# Altium PCB STM32F407VG2_Pcb.PcbDoc
Units mil, origin at the board's own origin, x right, y up, seen from the top; angles counter-clockwise.
Board outline 1757.76 x 1760 mil, 2 copper layers (Top Layer, Bottom Layer); 121 components, 90 nets, 234 pads, 134 vias.
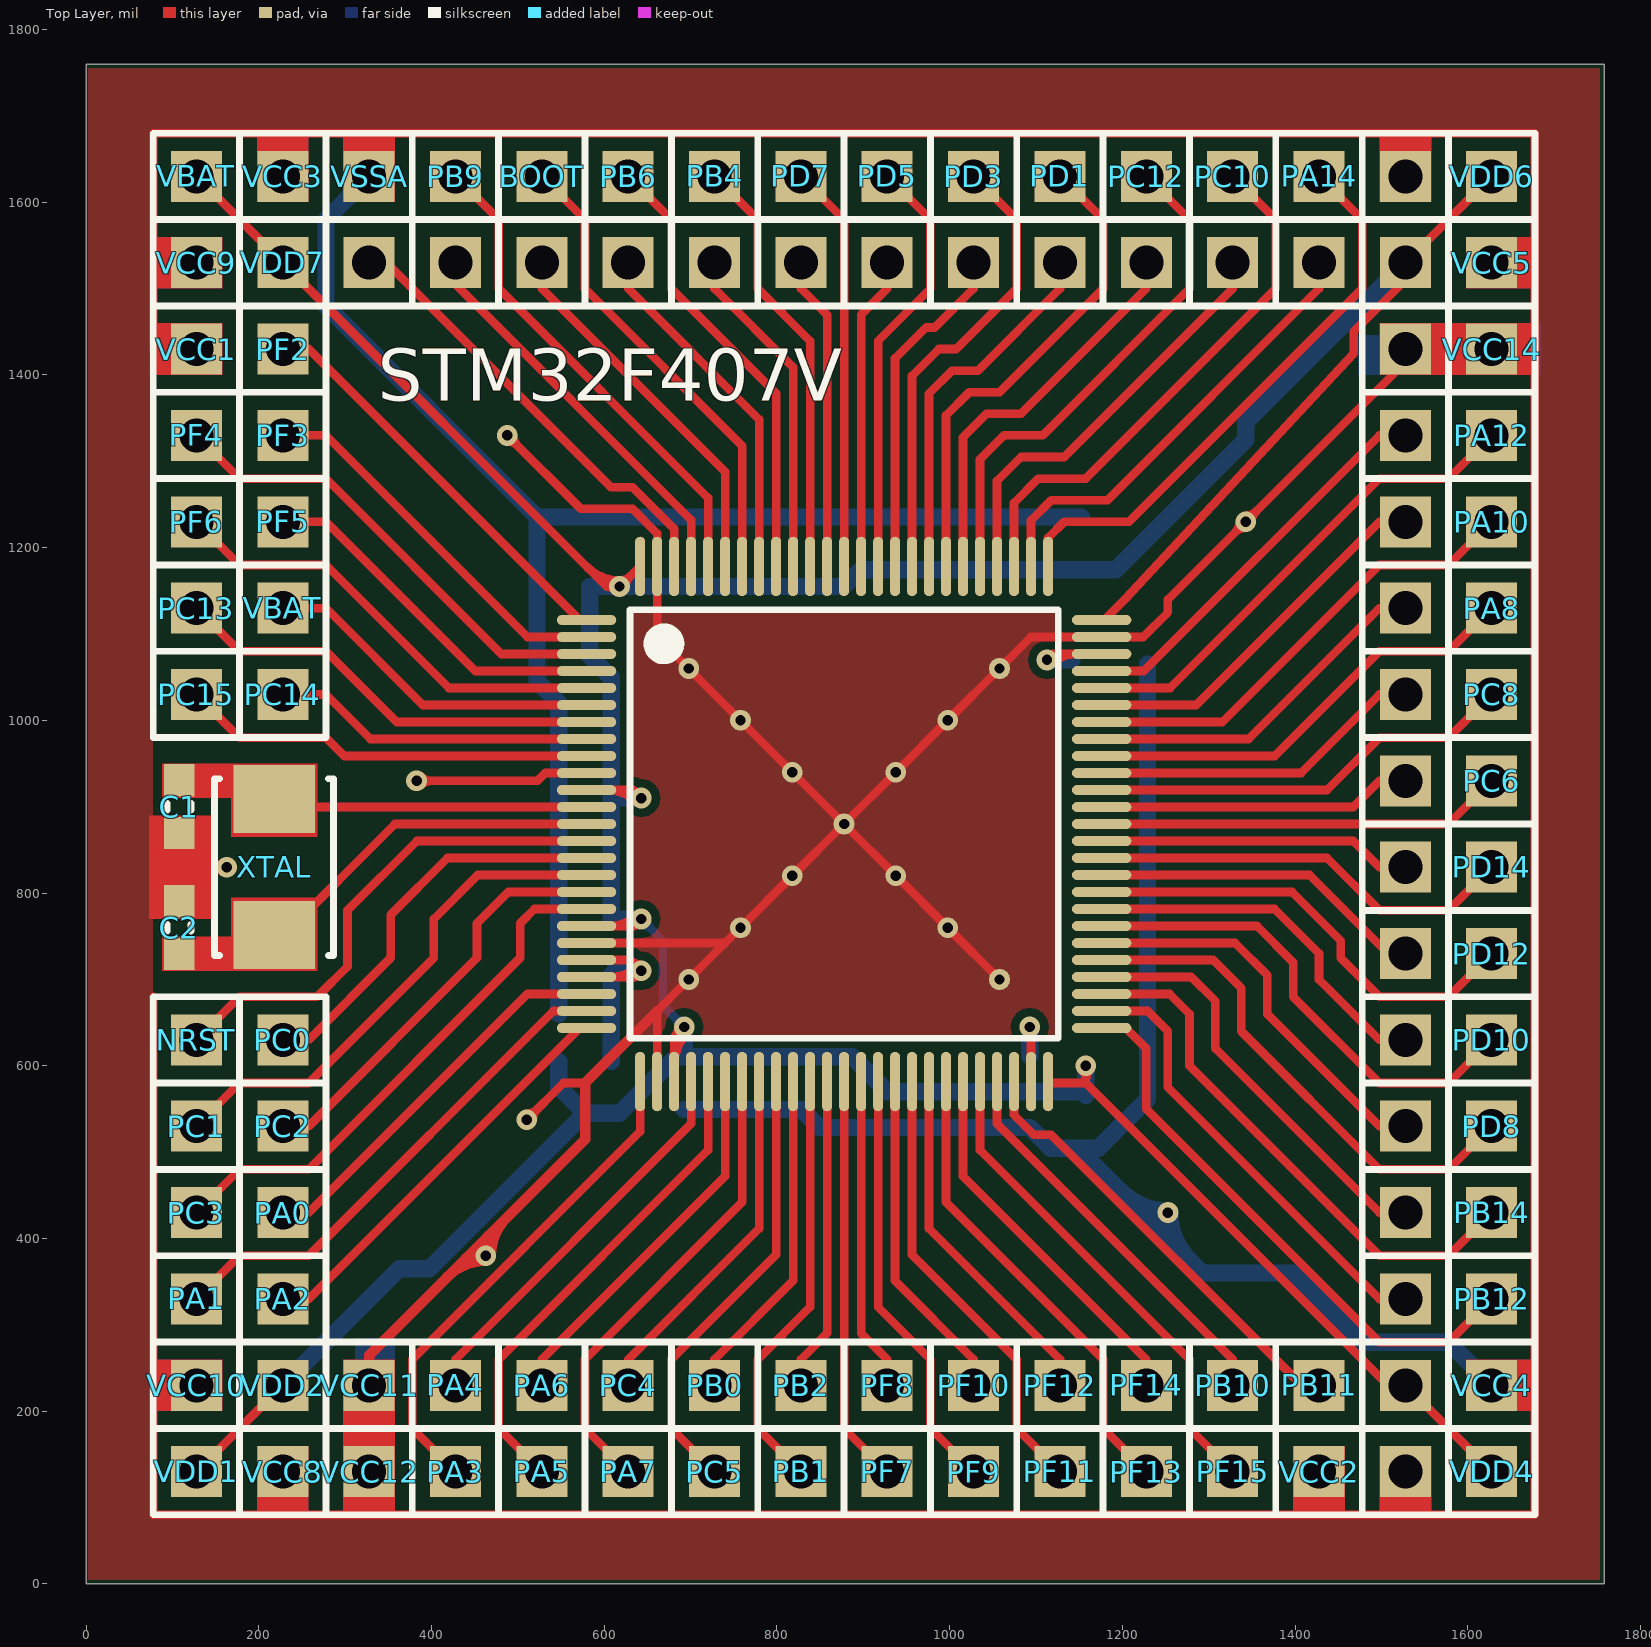
[diagram p0: Top Layer view]
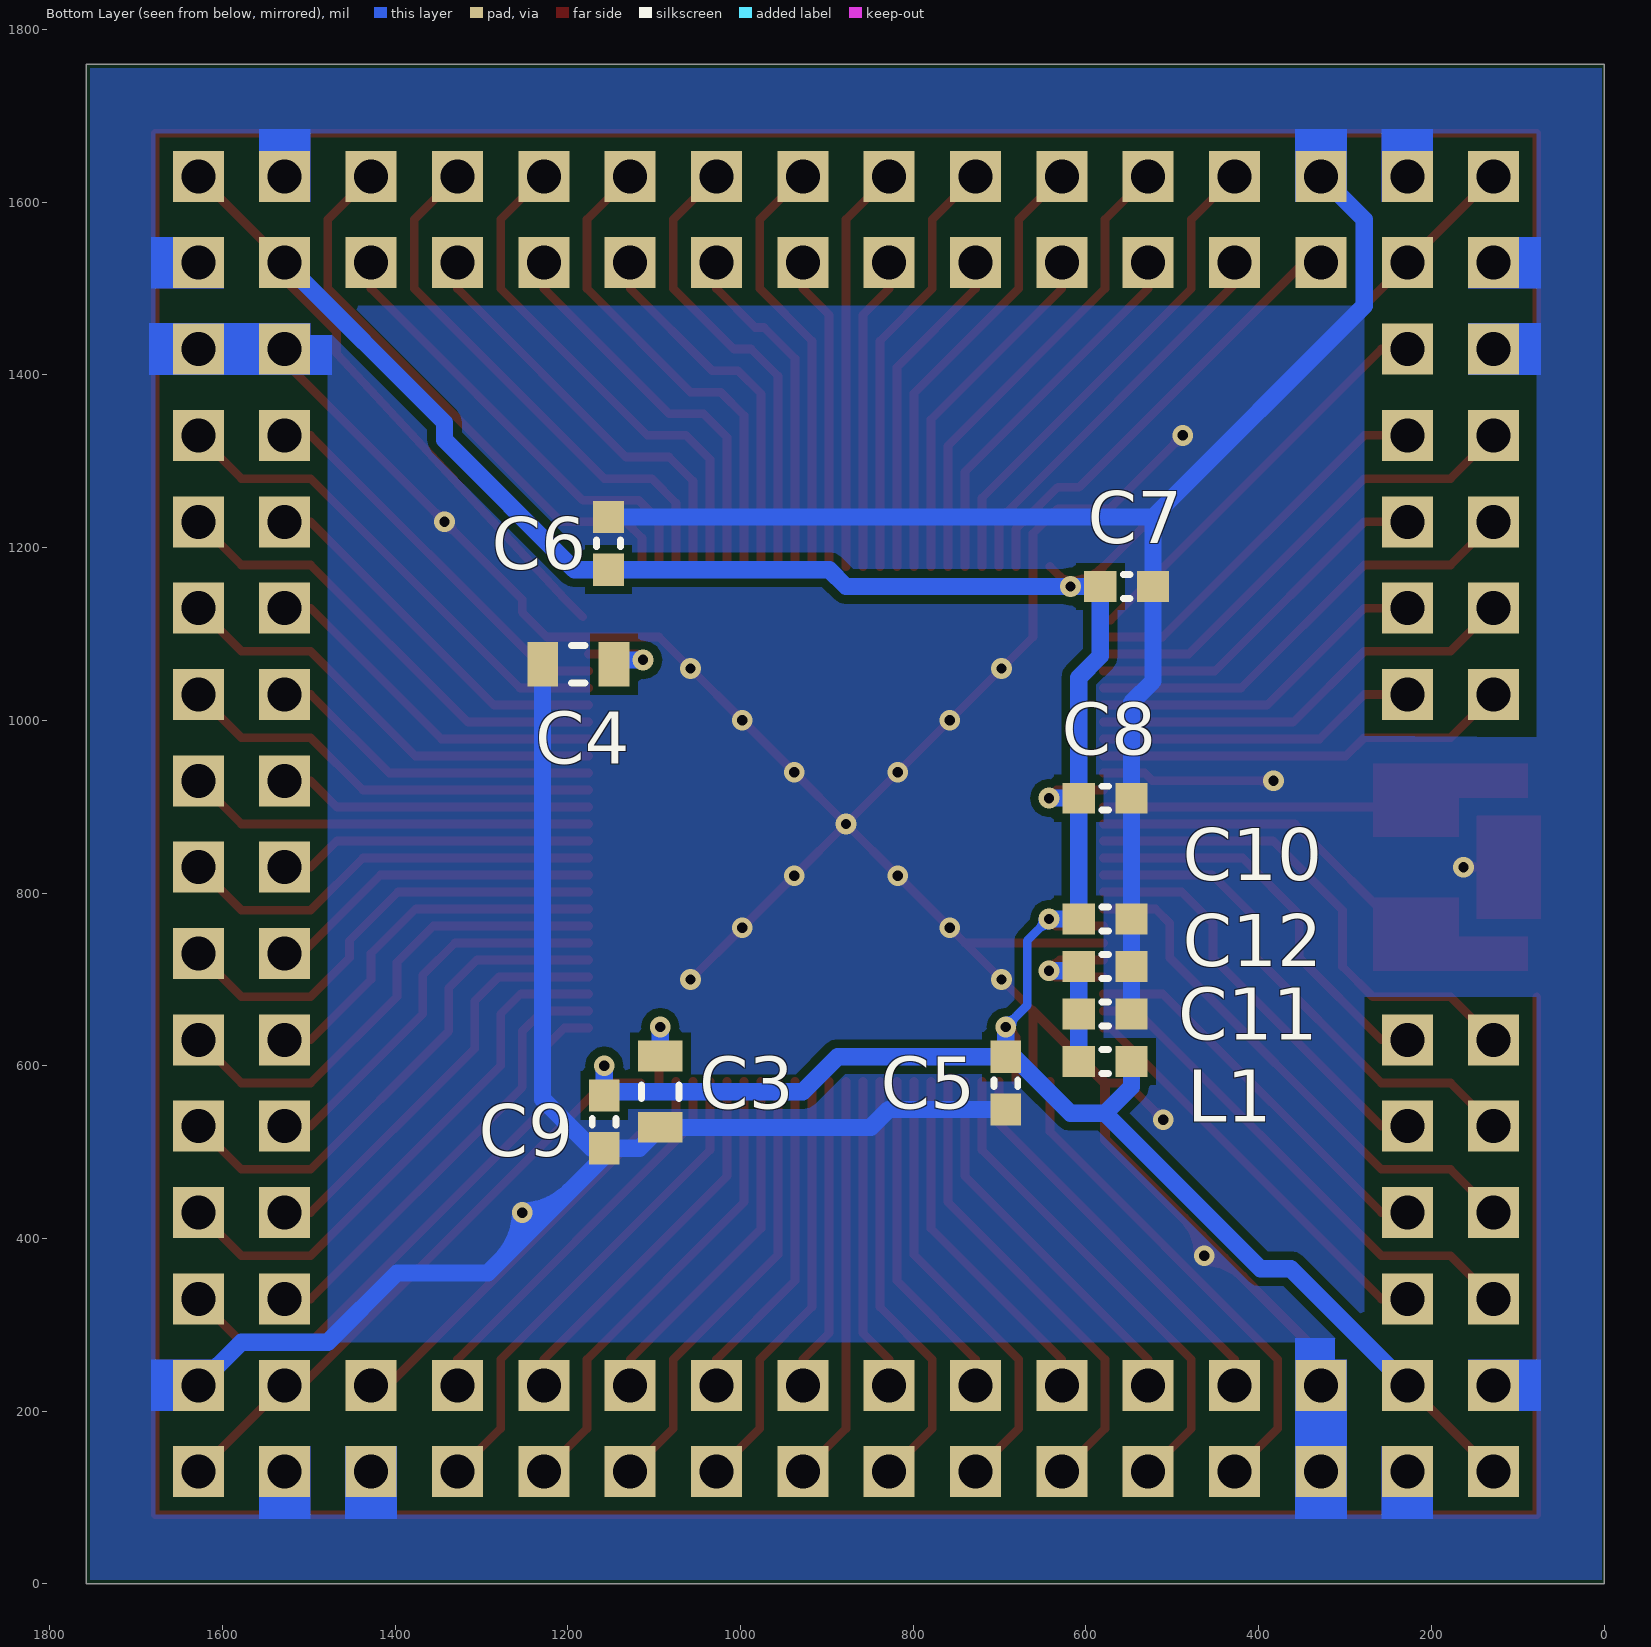
[diagram p1: Bottom Layer view, seen from below]

## Layer stack, top to bottom
Top Layer: signal copper 1.4
Dielectric: dielectric 12.6, FR-4, Dk 4.8
Bottom Layer: signal copper 1.4

## Board outline
0,1760 1757.76,1760 1757.76,0 0,0

## Design rules (kind name [scope] priority, off if disabled: settings)
Clearance [All] p1: gap=7
HoleToHoleClearance [All] p1: gap=5 allowstackedmicrovias=TRUE
MinimumSolderMaskSliver [All] p1: minsoldermaskwidth=5
PlaneConnect [All] p1: planeconnectstyle=Direct reliefexpansion=20 reliefentries=4 reliefconductorwidth=10 reliefairgap=10
PolygonConnect [All] p1: connectstyle=Direct reliefconductorwidth=10 reliefentries=4 polygonreliefangle="90 Angle" airgapwidth=10
RoutingVias [All] p1: holewidth=20 width=40 viastyle="Through Hole" minholewidth=10 minwidth=10 maxholewidth=50 maxwidth=50
SilkToSilkClearance [All] p1: silktosilkclearance=5
SilkToSolderMaskClearance [IsPad] p1: minsilkscreentomaskgap=5 clearancetoexposedcopper=TRUE
SolderMaskExpansion [All] p1: expansion=3
Width [All] p1: maxlimit=20 minlimit=5 preferedwidth=10
23 further rules are at their usual default settings.

## Classes and differential pairs
component class STM32F407VG_Sch: C3 C4 C5 C6 C7 C8 C9 C11 C12 F2 G L1 STM32F407V ""

## Components (designator, comment, footprint, x,y, rotation, side; value= is the part's Value field where it differs from the comment)
BOOT "Header 1" HDR1X1 527.76,1630 r90 top
C1 "Cap" 0603 107.76,900 r90 top
C2 "Cap" 0603 107.76,760 r90 top
C3 "2.2uf" 0805 1092.76,570 r270 bottom
C4 "2.2uf" 0805 1187.76,1065 r0 bottom
C5 "Cap" 0603 692.76,580 r270 bottom
C6 "Cap" 0603 1152.76,1205 r90 bottom
C7 "Cap" 0603 552.76,1155 r180 bottom
C8 "Cap" 0603 577.76,910 r180 bottom
C9 "Cap" 0603 1157.76,535 r270 bottom
C10 "Cap" 0603 577.76,770 r180 bottom
C11 "Cap" 0603 577.76,660 r0 bottom
C12 "Cap" 0603 577.76,715 r0 bottom
L1 "Inductor" 0603 577.76,605 r0 bottom
NRST "Header 1" HDR1X1 127.76,630 r90 top
PA0 "Header 1" HDR1X1 227.76,430 r0 top
PA1 "Header 1" HDR1X1 127.76,330 r0 top
PA2 "Header 1" HDR1X1 227.76,330 r0 top
PA3 "Header 1" HDR1X1 427.76,130 r0 top
PA4 "Header 1" HDR1X1 427.76,230 r0 top
PA5 "Header 1" HDR1X1 527.76,130 r0 top
PA6 "Header 1" HDR1X1 527.76,230 r0 top
PA7 "Header 1" HDR1X1 627.76,130 r0 top
PA8 "Header 1" HDR1X1 1627.76,1130 r0 top
PA9 "Header 1" HDR1X1 1527.76,1130 r0 top
PA10 "Header 1" HDR1X1 1627.76,1230 r90 top
PA11 "Header 1" HDR1X1 1527.76,1230 r90 top
PA12 "Header 1" HDR1X1 1627.76,1330 r90 top
PA13 "Header 1" HDR1X1 1527.76,1330 r90 top
PA14 "Header 1" HDR1X1 1427.76,1630 r90 top
PA15 "Header 1" HDR1X1 1427.76,1530 r90 top
PB0 "Header 1" HDR1X1 727.76,230 r0 top
PB1 "Header 1" HDR1X1 827.76,130 r0 top
PB2 "Header 1" HDR1X1 827.76,230 r0 top
PB3 "Header 1" HDR1X1 827.76,1530 r0 top
PB4 "Header 1" HDR1X1 727.76,1630 r0 top
PB5 "Header 1" HDR1X1 727.76,1530 r0 top
PB6 "Header 1" HDR1X1 627.76,1630 r0 top
PB7 "Header 1" HDR1X1 627.76,1530 r0 top
PB8 "Header 1" HDR1X1 527.76,1530 r0 top
PB9 "Header 1" HDR1X1 427.76,1630 r0 top
PB10 "Header 1" HDR1X1 1327.76,230 r90 top
PB11 "Header 1" HDR1X1 1427.76,230 r90 top
PB12 "Header 1" HDR1X1 1627.76,330 r90 top
PB13 "Header 1" HDR1X1 1527.76,330 r90 top
PB14 "Header 1" HDR1X1 1627.76,430 r90 top
PB15 "Header 1" HDR1X1 1527.76,430 r90 top
PC0 "Header 1" HDR1X1 227.76,630 r0 top
PC1 "Header 1" HDR1X1 127.76,530 r0 top
PC2 "Header 1" HDR1X1 227.76,530 r0 top
PC3 "Header 1" HDR1X1 127.76,430 r0 top
PC4 "Header 1" HDR1X1 627.76,230 r0 top
PC5 "Header 1" HDR1X1 727.76,130 r0 top
PC6 "Header 1" HDR1X1 1627.76,930 r0 top
PC7 "Header 1" HDR1X1 1527.76,930 r0 top
PC8 "Header 1" HDR1X1 1627.76,1030 r0 top
PC9 "Header 1" HDR1X1 1527.76,1030 r0 top
PC10 "Header 1" HDR1X1 1327.76,1630 r90 top
PC11 "Header 1" HDR1X1 1327.76,1530 r90 top
PC12 "Header 1" HDR1X1 1227.76,1630 r90 top
PC13 "Header 1" HDR1X1 127.76,1130 r90 top
PC14 "Header 1" HDR1X1 227.76,1030 r90 top
PC15 "Header 1" HDR1X1 127.76,1030 r90 top
PD0 "Header 1" HDR1X1 1227.76,1530 r0 top
PD1 "Header 1" HDR1X1 1127.76,1630 r0 top
PD2 "Header 1" HDR1X1 1127.76,1530 r0 top
PD3 "Header 1" HDR1X1 1027.76,1630 r0 top
PD4 "Header 1" HDR1X1 1027.76,1530 r0 top
PD5 "Header 1" HDR1X1 927.76,1630 r0 top
PD6 "Header 1" HDR1X1 927.76,1530 r0 top
PD7 "Header 1" HDR1X1 827.76,1630 r0 top
PD8 "Header 1" HDR1X1 1627.76,530 r0 top
PD9 "Header 1" HDR1X1 1527.76,530 r0 top
PD10 "Header 1" HDR1X1 1627.76,630 r90 top
PD11 "Header 1" HDR1X1 1527.76,630 r90 top
PD12 "Header 1" HDR1X1 1627.76,730 r90 top
PD13 "Header 1" HDR1X1 1527.76,730 r90 top
PD14 "Header 1" HDR1X1 1627.76,830 r90 top
PD15 "Header 1" HDR1X1 1527.76,830 r90 top
PF0 "Header 1" HDR1X1 427.76,1530 r0 top
PF1 "Header 1" HDR1X1 327.76,1530 r0 top
PF2 "Header 1" HDR1X1 227.76,1430 r0 top
PF3 "Header 1" HDR1X1 227.76,1330 r0 top
PF4 "Header 1" HDR1X1 127.76,1330 r0 top
PF5 "Header 1" HDR1X1 227.76,1230 r0 top
PF6 "Header 1" HDR1X1 127.76,1230 r0 top
PF7 "Header 1" HDR1X1 927.76,130 r0 top
PF8 "Header 1" HDR1X1 927.76,230 r0 top
PF9 "Header 1" HDR1X1 1027.76,130 r0 top
PF10 "Header 1" HDR1X1 1027.76,230 r90 top
PF11 "Header 1" HDR1X1 1127.76,130 r90 top
PF12 "Header 1" HDR1X1 1127.76,230 r90 top
PF13 "Header 1" HDR1X1 1227.76,130 r90 top
PF14 "Header 1" HDR1X1 1227.76,230 r90 top
PF15 "Header 1" HDR1X1 1327.76,130 r90 top
STM32F407V "STM32F407V" STM32F_100 877.76,880 r0 top (schematic designator STM32)
VBAT "Header 1" HDR1X1 227.76,1130 r90 top
VBAT "Header 1" HDR1X1 127.76,1630 r90 top
VCC1 "Header 1" HDR1X1 127.76,1430 r90 top
VCC2 "Header 1" HDR1X1 1427.76,130 r90 top
VCC3 "Header 1" HDR1X1 227.76,1630 r90 top
VCC4 "Header 1" HDR1X1 1627.76,230 r90 top
VCC5 "Header 1" HDR1X1 1627.76,1530 r90 top
VCC6 "Header 1" HDR1X1 1527.76,1630 r90 top
VCC7 "Header 1" HDR1X1 1527.76,130 r90 top
VCC8 "Header 1" HDR1X1 227.76,130 r90 top
VCC9 "Header 1" HDR1X1 127.76,1530 r90 top
VCC10 "Header 1" HDR1X1 127.76,230 r90 top
VCC11 "Header 1" HDR1X1 327.76,230 r90 top
VCC12 "Header 1" HDR1X1 327.76,130 r90 top
VCC13 "Header 1" HDR1X1 1527.76,1430 r90 top
VCC14 "Header 1" HDR1X1 1627.76,1430 r90 top
VDD1 "Header 1" HDR1X1 127.76,130 r90 top
VDD2 "Header 1" HDR1X1 227.76,230 r90 top
VDD3 "Header 1" HDR1X1 1527.76,230 r90 top
VDD4 "Header 1" HDR1X1 1627.76,130 r90 top
VDD5 "Header 1" HDR1X1 1527.76,1530 r90 top
VDD6 "Header 1" HDR1X1 1627.76,1630 r90 top
VDD7 "Header 1" HDR1X1 227.76,1530 r90 top
VSSA "Header 1" HDR1X1 327.76,1630 r90 top
XTAL "XTAL" XTAL_5032 217.76,830 r270 top

## Footprints (in the part's own frame and the unit in brackets; to place one, negate y for a bottom-side part, rotate by r counter-clockwise, add the part's x,y. Pads: shape width x height; smd on the part's side, far side on the other; paste and mask are expansions set on the pad)
0603 [mm] "Chip Capacitor, 2-Leads, Body 1.6x0.8mm, IPC Medium Density"
  rect 0.95x0.9 smd: 1(-0.775,0) 2(0.775,0)
  silkscreen extent -0.1,-0.35 0.1,0.35, body extent -0.85,-0.45 0.85,0.45, height 0.8
0805 [mm] "Chip Inductor, 2-Leads, Body 2.0x1.2mm, IPC Medium Density"
  rect 0.9x1.3 smd: 1(-1.05,0) 2(1.05,0)
  silkscreen extent -0.2,-0.55 0.2,0.55, body extent -1,-0.6 1,0.6, height 0.5
HDR1X1 [mm] "Connector; Header; 2 Position"
  rect 1.5x1.5 hole 0.9: 1(0,0)
  silkscreen extent -1.27,-1.27 1.27,1.27
STM32F_100 [mm] "TSQFP, 100-Leads, Body 16.2x16.2mm (max), Pitch 0.50mm, IPC Medium Density"
  oval 1.75x0.3 smd: 1(-7.575,6) 2(-7.575,5.5) 3(-7.575,5) 4(-7.575,4.5) 5(-7.575,4) 6(-7.575,3.5) 7(-7.575,3) 8(-7.575,2.5) 9(-7.575,2) 10(-7.575,1.5) 11(-7.575,1) 12(-7.575,0.5) 13(-7.575,0) 14(-7.575,-0.5) 15(-7.575,-1) 16(-7.575,-1.5) 17(-7.575,-2) 18(-7.575,-2.5) 19(-7.575,-3) 20(-7.575,-3.5) 21(-7.575,-4) 22(-7.575,-4.5) 23(-7.575,-5) 24(-7.575,-5.5) 25(-7.575,-6) 51(7.575,-6) 52(7.575,-5.5) 53(7.575,-5) 54(7.575,-4.5) 55(7.575,-4) 56(7.575,-3.5) 57(7.575,-3) 58(7.575,-2.5) 59(7.575,-2) 60(7.575,-1.5) 61(7.575,-1) 62(7.575,-0.5) 63(7.575,0) 64(7.575,0.5) 65(7.575,1) 66(7.575,1.5) 67(7.575,2) 68(7.575,2.5) 69(7.575,3) 70(7.575,3.5) 71(7.575,4) 72(7.575,4.5) 73(7.575,5) 74(7.575,5.5) 75(7.575,6)
  oval 0.3x1.75 smd: 26(-6,-7.575) 27(-5.5,-7.575) 28(-5,-7.575) 29(-4.5,-7.575) 30(-4,-7.575) 31(-3.5,-7.575) 32(-3,-7.575) 33(-2.5,-7.575) 34(-2,-7.575) 35(-1.5,-7.575) 36(-1,-7.575) 37(-0.5,-7.575) 38(0,-7.575) 39(0.5,-7.575) 40(1,-7.575) 41(1.5,-7.575) 42(2,-7.575) 43(2.5,-7.575) 44(3,-7.575) 45(3.5,-7.575) 46(4,-7.575) 47(4.5,-7.575) 48(5,-7.575) 49(5.5,-7.575) 50(6,-7.575) 76(6,7.575) 77(5.5,7.575) 78(5,7.575) 79(4.5,7.575) 80(4,7.575) 81(3.5,7.575) 82(3,7.575) 83(2.5,7.575) 84(2,7.575) 85(1.5,7.575) 86(1,7.575) 87(0.5,7.575) 88(0,7.575) 89(-0.5,7.575) 90(-1,7.575) 91(-1.5,7.575) 92(-2,7.575) 93(-2.5,7.575) 94(-3,7.575) 95(-3.5,7.575) 96(-4,7.575) 97(-4.5,7.575) 98(-5,7.575) 99(-5.5,7.575) 100(-6,7.575)
  silkscreen extent -6.3,-6.3 6.3,6.3, body extent -7,-7 7,7, height 1.6
XTAL_5032 [mm] "Molded Capacitor, 2-Leads, Body 5.0x3.2mm, IPC Medium Density"
  rect 2x2.4 smd: 1(-2,0) 2(2,0)
  silkscreen extent -2.6,-1.75 2.6,1.75, body extent -2.6,-1.7 2.6,1.7, height 1.5

## Part data
BOOT NRST PA0 PA1 PA2 PA3 PA4 PA5 PA6 PA7 PA8 PA9 PA10 PA11 PA12 PA13 PA14 PA15 PB0 PB1 PB2 PB3 PB4 PB5 PB6 PB7 PB8 PB9 PB10 PB11 PB12 PB13 PB14 PB15 PC0 PC1 PC2 PC3 PC4 PC5 PC6 PC7 PC8 PC9 PC10 PC11 PC12 PC13 PC14 PC15 PD0 PD1 PD2 PD3 PD4 PD5 PD6 PD7 PD8 PD9 PD10 PD11 PD12 PD13 PD14 PD15 PF0 PF1 PF2 PF3 PF4 PF5 PF6 PF7 PF8 PF9 PF10 PF11 PF12 PF13 PF14 PF15 VBAT VBAT VCC1 VCC2 VCC3 VCC4 VCC5 VCC6 VCC7 VCC8 VCC9 VCC10 VCC11 VCC12 VCC13 VCC14 VDD1 VDD2 VDD3 VDD4 VDD5 VDD6 VDD7 VSSA: "Header, 1-Pin"
C1 C2 C5 C6 C7 C8 C9 C10 C11 C12: "Capacitor"
C3 C4: library part "Cap Pol2", "Polarized Capacitor (Axial)"
STM32F407V: "MCU"
XTAL: "Crystal"

## Via types
v1: diameter 45, hole 39.37, Top Layer to Bottom Layer, 106 vias
v2: diameter 24, hole 12, Top Layer to Bottom Layer, 28 vias

## Nets (pads, with @x,y where several pads share a name; then routed paths per layer and width w, separated by ;. In a path a pad name is that pad's centre, name@x,y a point inside that pad or via, vN(x,y) a via of type N, cw(c..) or ccw(c..) an arc to the next point about the centre after c; other vN are vias at no path point)
3V3: C5.1 C6.1 C7.1 C8.1 C9.1 C10.1 L1.1 STM32F407V.11 STM32F407V.19 STM32F407V.28 STM32F407V.50 STM32F407V.75 STM32F407V.100 VBAT.1@127.76,1630 VDD1.1 VDD2.1 VDD3.1 VDD4.1 VDD5.1 VDD6.1 VDD7.1 | length 5829.5
  Top Layer w10: v1(127.76,130) v1(227.76,230) ; v1(127.76,1630) v1(227.76,1530) 602.76,1155 ; STM32F407V.19 634.65,761.89 v2(642.76,770) ; STM32F407V.11 633.39,919.37 ; 580.21,1177.56 ccw(c617.76,1215.11) 617.76,1162 ccw(c617.76,1180.23) 630.66,1167.34 ; 597.28,1160.49 ccw(c617.76,1180.97) v2@617.76,1152 ; STM32F407V.11@603.24,919.37 cw(c603.24,870.48) v2@637.82,905.05 ; STM32F407V.19@606.29,761.89 ccw(c606.29,806.48) v2@637.82,774.95 ; v2@612.4,1150.5 ccw(c602.77,1142.43) 602.77,1155 ; v2@612.4,1159.5 cw(c602.77,1167.57) 602.77,1155 ; v2(617.76,1155) 602.76,1155 ; v2@618.32,1155 STM32F407V.100 ; v2@624.76,1155 cw(c640.33,1155) 629.32,1166.01 ; 627.39,919.37 cw(c627.39,894.62) v2@644.89,912.12 ; 630.43,761.89 ccw(c630.43,782.34) v2@644.89,767.88 ; v2@635.89,911.3 ccw(c627,912.98) 633.4,919.37 ; v2@641.47,916.88 cw(c639.79,925.76) 633.4,919.37 ; v2(642.76,910) 633.39,919.37 ; STM32F407V.28 680.91,633.15 ; STM32F407V.28@680.91,599.49 cw(c738.27,599.49) v2@697.71,640.05 ; 680.91,623.63 cw(c714.13,623.63) v2@690.64,647.12 ; v2@685.77,644.96 cw(c669.21,644.86) 680.92,633.15 ; v2@692.72,638 ccw(c692.62,621.44) 680.92,633.15 ; v2(692.76,645) 680.91,633.15 ; STM32F407V.50@1115.76,580 1157.76,580 ; v2@1152.82,595.05 cw(c1140.87,583.1) 1157.76,583.1 cw(c1174.66,583.1) v2@1162.71,595.05 ; v2(1157.76,600) 1157.76,580 ; STM32F407V.75@1182.76,1120 1202.76,1140 1467.76,1425 1467.76,1450 VDD5.1@1527.76,1510 ; v1(1527.76,1530) v1(1627.76,1630) ; v1(1627.76,130) v1(1527.76,230) 1507.76,230 1157.76,580
  Bottom Layer w10: v2@642.76,763 cw(c642.76,746.1) 654.71,758.05 cw(c666.66,770) v2@649.76,770 ; v2(642.76,770) 667.76,745 667.76,670 v2(692.76,645) ; v2@685.76,645 ccw(c668.87,645) 680.82,656.95 ccw(c692.76,668.9) v2@692.76,652
  Bottom Layer w20: v1(227.76,230) 362.76,365 397.76,365 577.76,545 ; L1.1 547.25,575.51 577.76,545 ; v2(642.76,770) C10.1 C8.1 ; v2(642.76,910) C8.1 ; v2(692.76,645) C5.1 ; C9.1@1153.28,570 927.76,570 887.25,610.51 C5.1 ; C9.1 v2(1157.76,600) ; v1(1527.76,1530) 1342.76,1345 1342.76,1325 1192.25,1174.49 C6.1 897.25,1174.49 877.76,1155 v2(617.76,1155) C7.1 583.28,1074.49 608.28,1049.49 C8.1 ; 577.76,545 617.76,545 683.28,610.51 C5.1
BOOT: BOOT.1 STM32F407V.94 | length 547.8
  Top Layer w10: v1(527.76,1630) 577.76,1580 577.76,1500 759.65,1318.11 STM32F407V.94
GND: C1.1 C2.2 C3.2 C4.2 C5.2 C6.2 C7.2 C8.2 C9.2 C10.2 C11.1 C12.1 STM32F407V.10 STM32F407V.20 STM32F407V.27 STM32F407V.74 STM32F407V.99 VCC1.1 VCC2.1 VCC3.1 VCC4.1 VCC5.1 VCC6.1 VCC7.1 VCC8.1 VCC9.1 VCC10.1 VCC11.1 VCC12.1 VCC13.1 VCC14.1 VSSA.1 | length 13564.9
  Top Layer w10: 77.76,680 77.76,230 ; v1(127.76,230) 77.76,230 ; v1(127.76,1430) 77.76,1430 77.76,1530 ; v1(127.76,1530) 77.76,1530 ; 137.76,830 v2(162.76,830) ; v2@157.82,825.05 ccw(c145.87,813.1) 145.87,830 ccw(c145.87,846.9) v2@157.82,834.95 ; v1(227.76,130) 227.76,80 ; v1(227.76,1630) 227.76,1680 ; v1(327.76,230) v1(327.76,130) 327.76,80 ; v1(327.76,1630) 327.76,1680 ; v2(382.76,930) 522.76,930 531.82,939.06 STM32F407V.10 ; v2@387.71,925.05 cw(c399.66,913.1) 399.66,930 cw(c399.66,946.9) v2@387.71,934.95 ; v2@487.76,1323 cw(c487.76,1306.1) 499.71,1318.05 cw(c511.66,1330) v2@494.76,1330 ; v2(487.76,1330) 572.76,1245 632.76,1245 661.23,1216.54 STM32F407V.99 661.23,1096.54 v2@818.71,939.06 ; v2(510.26,537.5) 552.86,580.1 577.86,580.1 ; v2@510.26,544.5 ccw(c510.26,561.4) 522.21,549.45 ccw(c534.16,537.5) v2@517.26,537.5 ; STM32F407V.20 739.97,742.2 ; STM32F407V.27 661.23,663.46 739.97,742.2 ; v2@817.76,939.06 v2@818.71,939.06 ; v2(1057.76,700) v2(997.76,760) v2(937.76,820) v2(877.76,880) ; v2@1335.76,1230 cw(c1318.87,1230) 1330.82,1218.05 cw(c1342.76,1206.1) v2@1342.76,1223 ; v2@1342.76,1237 ccw(c1342.76,1253.9) 1354.71,1241.95 ccw(c1366.66,1230) v2@1349.76,1230 ; v1(1427.76,130) 1427.76,80 ; v1(1527.76,130) 1527.76,80 ; v1(1527.76,1630) 1527.76,1680 ; v1(1627.76,230) 1677.76,230 ; v1(1627.76,1530) 1677.76,1530 ; 77.76,230 77.76,80 227.76,80 ; 77.76,1530 77.76,1680 227.76,1680 ; 227.76,80 327.76,80 ; 227.76,1680 327.76,1680 ; 327.76,80 1427.76,80 ; 327.76,1680 1527.76,1680 ; 739.97,742.2 v2(757.76,760) v2(817.76,820) v2(877.76,880) ; v2@818.71,939.06 v2(877.76,880) ; v2(877.76,880) v2(937.76,940) v2(997.76,1000) v2(1057.76,1060) 1094.3,1096.54 STM32F407V.74 1224.3,1096.54 1252.76,1125 1252.76,1140 1527.76,1415 v1(1527.76,1430) v1(1627.76,1430) 1677.76,1430 ; 1427.76,80 1527.76,80 ; 1527.76,80 1677.76,80 1677.76,230 ; 1527.76,1680 1677.76,1680 1677.76,1530 ; 1677.76,230 1677.76,1430 ; 1677.76,1430 1677.76,1530
  Top Layer w12: v1(327.76,230) 327.76,265 577.86,515.1 577.86,580.1 661.23,663.46 ; 418.38,355.62 cw(c462.76,311.23) v2@462.76,374 ; 438.87,376.1 cw(c462.76,352.2) v2@462.76,386 ; v2@456.76,380 cw(c490.56,380) 466.66,403.9 ; v2@468.76,380 cw(c531.53,380) 487.15,424.38
  Bottom Layer w20: v1(327.76,1630) 277.76,1580 277.76,1480 522.25,1235.51 ; C11.1 C12.1 C10.2 C8.2 547.25,1020.51 522.25,1045.51 C7.2 522.25,1235.51 ; C5.2 828.28,549.49 849.1,528.66 C3.2 1116.94,504.49 C9.2 ; C6.2 522.25,1235.51 ; 1198.14,454.63 ccw(c1252.76,509.25) v2@1252.76,432 ; C4.2 1229.1,561.34 1172.25,504.49 C9.2 ; v2@1254.76,430 ccw(c1332.02,430) 1277.39,375.37 ; v1(1627.76,230) 1577.76,280 1477.76,280 1397.76,360 1292.76,360 1157.76,495 C9.2
  other v2: 462.76,380 1252.76,430 697.76,700 817.76,940 757.76,1000 697.76,1060 1342.76,1230
NRST: NRST.1 STM32F407V.14 | length 585.2
  Top Layer w10: v1(127.76,630) 177.76,680 267.76,680 302.76,715 302.76,780 383.08,860.31 STM32F407V.14
OSC1: C1.2 STM32F407V.12 XTAL.1 | length 352.7
  Top Layer w10: XTAL.1@226.82,899.68 STM32F407V.12
OSC2: C2.1 STM32F407V.13 XTAL.2 | length 415.1
  Top Layer w10: XTAL.2 229.02,751.26 357.76,880 STM32F407V.13
PA0: PA0.1 STM32F407V.23 | length 456.6
  Top Layer w10: v1(227.76,430) 257.76,430 510.91,683.15 STM32F407V.23
PA1: PA1.1 STM32F407V.24 | length 589.9
  Top Layer w10: v1(127.76,330) 177.76,380 257.76,380 541.23,663.46 STM32F407V.24
PA2: PA2.1 STM32F407V.25 | length 481.7
  Top Layer w10: v1(227.76,330) 257.76,330 571.54,643.78 STM32F407V.25
PA3: PA3.1 STM32F407V.26 | length 581.7
  Top Layer w10: v1(427.76,130) 377.76,180 377.76,260 641.54,523.78 STM32F407V.26
PA4: PA4.1 STM32F407V.29 | length 464.8
  Top Layer w10: v1(427.76,230) 427.76,260 700.6,532.83 STM32F407V.29
PA5: PA5.1 STM32F407V.30 | length 572.9
  Top Layer w10: v1(527.76,130) 477.76,180 477.76,260 720.28,502.52 STM32F407V.30
PA6: PA6.1 STM32F407V.31 | length 439.7
  Top Layer w10: v1(527.76,230) 527.76,260 739.97,472.2 STM32F407V.31
PA7: PA7.1 STM32F407V.32 | length 547.8
  Top Layer w10: v1(627.76,130) 577.76,180 577.76,260 759.65,441.89 STM32F407V.32
PA8: PA8.1 STM32F407V.67 | length 522.7
  Top Layer w10: STM32F407V.67 1376.51,958.74 1497.76,1080 1577.76,1080 v1(1627.76,1130)
PA9: PA9.1 STM32F407V.68 | length 414.6
  Top Layer w10: STM32F407V.68 1346.19,978.43 1497.76,1130 v1(1527.76,1130)
PA10: PA10.1 STM32F407V.69 | length 547.8
  Top Layer w10: STM32F407V.69 1315.88,998.11 1497.76,1180 1577.76,1180 v1(1627.76,1230)
PA11: PA11.1 STM32F407V.70 | length 439.7
  Top Layer w10: STM32F407V.70 1285.56,1017.8 1497.76,1230 v1(1527.76,1230)
PA12: PA12.1 STM32F407V.71 | length 572.9
  Top Layer w10: STM32F407V.71 1255.25,1037.48 1497.76,1280 1577.76,1280 v1(1627.76,1330)
PA13: PA13.1 STM32F407V.72 | length 464.8
  Top Layer w10: STM32F407V.72 1224.93,1057.17 1497.76,1330 v1(1527.76,1330)
PA14: PA14.1 STM32F407V.76 | length 667.1
  Top Layer w10: STM32F407V.76 1113.99,1211.22 1132.76,1230 1207.76,1230 1477.76,1500 1477.76,1580 v1(1427.76,1630)
PA15: PA15.1 STM32F407V.77 | length 528
  Top Layer w10: STM32F407V.77 1094.3,1231.54 1117.76,1255 1182.76,1255 1427.76,1500 v1(1427.76,1530)
PB0: PB0.1 STM32F407V.35 | length 389.4
  Top Layer w10: v1(727.76,230) 727.76,260 818.71,350.94 STM32F407V.35
PB1: PB1.1 STM32F407V.36 | length 497.6
  Top Layer w10: v1(827.76,130) 777.76,180 777.76,260 838.39,320.63 STM32F407V.36
PB2: PB2.1 STM32F407V.37 | length 364.3
  Top Layer w10: v1(827.76,230) 827.76,260 858.08,290.32 STM32F407V.37
PB3: PB3.1 STM32F407V.89 | length 364.3
  Top Layer w10: v1(827.76,1530) 827.76,1500 858.08,1469.68 STM32F407V.89
PB4: PB4.1 STM32F407V.90 | length 497.6
  Top Layer w10: v1(727.76,1630) 777.76,1580 777.76,1500 838.39,1439.37 STM32F407V.90
PB5: PB5.1 STM32F407V.91 | length 389.4
  Top Layer w10: v1(727.76,1530) 727.76,1500 818.71,1409.06 STM32F407V.91
PB6: PB6.1 STM32F407V.92 | length 522.7
  Top Layer w10: v1(627.76,1630) 677.76,1580 677.76,1500 799.02,1378.74 STM32F407V.92
PB7: PB7.1 STM32F407V.93 | length 414.6
  Top Layer w10: v1(627.76,1530) 627.76,1500 779.34,1348.43 STM32F407V.93
PB8: PB8.1 STM32F407V.95 | length 439.7
  Top Layer w10: v1(527.76,1530) 527.76,1500 739.97,1287.8 STM32F407V.95
PB9: PB9.1 STM32F407V.96 | length 572.9
  Top Layer w10: v1(427.76,1630) 477.76,1580 477.76,1500 720.28,1257.48 STM32F407V.96
PB10: PB10.1 STM32F407V.47 | length 464.8
  Top Layer w10: STM32F407V.47 1054.93,532.83 1327.76,260 v1(1327.76,230)
PB11: PB11.1 STM32F407V.48 | length 521.5
  Top Layer w10: STM32F407V.48 1074.62,543.15 1097.76,520 1117.76,520 1407.76,230 v1(1427.76,230)
PB12: PB12.1 STM32F407V.51 | length 664.2
  Top Layer w10: STM32F407V.51 1203.99,643.78 1227.76,620 1227.76,550 1497.76,280 1577.76,280 v1(1627.76,330)
PB13: PB13.1 STM32F407V.52 | length 528
  Top Layer w10: STM32F407V.52 1229.3,663.46 1252.76,640 1252.76,575 1497.76,330 v1(1527.76,330)
PB14: PB14.1 STM32F407V.53 | length 633.2
  Top Layer w10: STM32F407V.53 1254.62,683.15 1277.76,660 1277.76,600 1497.76,380 1577.76,380 v1(1627.76,430)
PB15: PB15.1 STM32F407V.54 | length 497
  Top Layer w10: STM32F407V.54 1279.93,702.83 1307.76,675 1307.76,620 1497.76,430 v1(1527.76,430)
PC0: PC0.1 STM32F407V.15 | length 468.3
  Top Layer w10: v1(227.76,630) 257.76,630 352.76,725 352.76,775 418.39,840.63 STM32F407V.15
PC1: PC1.1 STM32F407V.16 | length 598.6
  Top Layer w10: v1(127.76,530) 177.76,580 257.76,580 402.76,725 402.76,770 453.71,820.94 STM32F407V.16
PC2: PC2.1 STM32F407V.17 | length 487.6
  Top Layer w10: v1(227.76,530) 257.76,530 452.76,725 452.76,765 489.02,801.26 STM32F407V.17
PC3: PC3.1 STM32F407V.18 | length 620.8
  Top Layer w10: v1(127.76,430) 177.76,480 257.76,480 502.76,725 502.76,765 519.34,781.57 STM32F407V.18
PC4: PC4.1 STM32F407V.33 | length 414.6
  Top Layer w10: v1(627.76,230) 627.76,260 779.34,411.57 STM32F407V.33
PC5: PC5.1 STM32F407V.34 | length 522.7
  Top Layer w10: v1(727.76,130) 677.76,180 677.76,260 799.02,381.26 STM32F407V.34
PC6: PC6.1 STM32F407V.63 | length 472.5
  Top Layer w10: STM32F407V.63 1577.76,880 v1(1627.76,930)
PC7: PC7.1 STM32F407V.64 | length 364.3
  Top Layer w10: STM32F407V.64 1467.45,899.68 1497.76,930 v1(1527.76,930)
PC8: PC8.1 STM32F407V.65 | length 497.6
  Top Layer w10: STM32F407V.65 1437.13,919.37 1497.76,980 1577.76,980 v1(1627.76,1030)
PC9: PC9.1 STM32F407V.66 | length 389.4
  Top Layer w10: STM32F407V.66 1406.82,939.06 1497.76,1030 v1(1527.76,1030)
PC10: PC10.1 STM32F407V.78 | length 630.3
  Top Layer w10: STM32F407V.78 1074.62,1251.85 1102.76,1280 1157.76,1280 1377.76,1500 1377.76,1580 v1(1327.76,1630)
PC11: PC11.1 STM32F407V.79 | length 494.1
  Top Layer w10: STM32F407V.79 1054.93,1277.17 1082.76,1305 1132.76,1305 1327.76,1500 v1(1327.76,1530)
PC12: PC12.1 STM32F407V.80 | length 599.3
  Top Layer w10: STM32F407V.80 1035.25,1302.48 1062.76,1330 1107.76,1330 1277.76,1500 1277.76,1580 v1(1227.76,1630)
PC13: PC13.1 STM32F407V.7 | length 506.4
  Top Layer w10: v1(127.76,1130) 177.76,1080 277.76,1080 359.65,998.11 STM32F407V.7
PC14: PC14.1 STM32F407V.8 | length 373.1
  Top Layer w10: v1(227.76,1030) 277.76,1030 329.34,978.43 STM32F407V.8
PC15: PC15.1 STM32F407V.9 | length 481.3
  Top Layer w10: v1(127.76,1030) 177.76,980 277.76,980 299.02,958.74 STM32F407V.9
PD0: PD0.1 STM32F407V.81 | length 463.1
  Top Layer w10: STM32F407V.81 1015.56,1327.8 1042.76,1355 1082.76,1355 1227.76,1500 v1(1227.76,1530)
PD1: PD1.1 STM32F407V.82 | length 568.3
  Top Layer w10: STM32F407V.82 995.88,1353.11 1022.76,1380 1057.76,1380 1177.76,1500 1177.76,1580 v1(1127.76,1630)
PD2: PD2.1 STM32F407V.83 | length 432.1
  Top Layer w10: STM32F407V.83 976.19,1378.43 1002.76,1405 1032.76,1405 1127.76,1500 v1(1127.76,1530)
PD3: PD3.1 STM32F407V.84 | length 534.4
  Top Layer w10: STM32F407V.84 956.51,1398.74 987.76,1430 1007.76,1430 1077.76,1500 1077.76,1580 v1(1027.76,1630)
PD4: PD4.1 STM32F407V.85 | length 395.3
  Top Layer w10: STM32F407V.85 936.82,1419.06 972.76,1455 982.76,1455 1027.76,1500 v1(1027.76,1530)
PD5: PD5.1 STM32F407V.86 | length 497.6
  Top Layer w10: STM32F407V.86 917.14,1439.37 977.76,1500 977.76,1580 v1(927.76,1630)
PD6: PD6.1 STM32F407V.87 | length 364.3
  Top Layer w10: STM32F407V.87 897.45,1469.69 927.76,1500 v1(927.76,1530)
PD7: PD7.1 STM32F407V.88 | length 472.5
  Top Layer w10: v1(827.76,1630) 877.76,1580 STM32F407V.88
PD8: PD8.1 STM32F407V.55 | length 602.2
  Top Layer w10: STM32F407V.55 1305.25,722.52 1337.76,690 1337.76,640 1497.76,480 1577.76,480 v1(1627.76,530)
PD9: PD9.1 STM32F407V.56 | length 466
  Top Layer w10: STM32F407V.56 1330.56,742.2 1367.76,705 1367.76,660 1497.76,530 v1(1527.76,530)
PD10: PD10.1 STM32F407V.57 | length 571.3
  Top Layer w10: STM32F407V.57 1355.88,761.89 1397.76,720 1397.76,680 1497.76,580 1577.76,580 v1(1627.76,630)
PD11: PD11.1 STM32F407V.58 | length 432.1
  Top Layer w10: STM32F407V.58 1376.19,781.57 1427.76,730 1427.76,700 1497.76,630 v1(1527.76,630)
PD12: PD12.1 STM32F407V.59 | length 534.4
  Top Layer w10: STM32F407V.59 1396.51,801.26 1452.76,745 1452.76,725 1497.76,680 1577.76,680 v1(1627.76,730)
PD13: PD13.1 STM32F407V.60 | length 389.4
  Top Layer w10: STM32F407V.60 1416.82,820.94 1507.76,730 v1(1527.76,730)
PD14: PD14.1 STM32F407V.61 | length 497.6
  Top Layer w10: STM32F407V.61 1437.14,840.63 1497.76,780 1577.76,780 v1(1627.76,830)
PD15: PD15.1 STM32F407V.62 | length 364.3
  Top Layer w10: STM32F407V.62 1467.45,860.31 1497.76,830 v1(1527.76,830)
PE0: PF0.1 STM32F407V.97 | length 464.8
  Top Layer w10: v1(427.76,1530) 427.76,1505 700.6,1232.17 STM32F407V.97
PE1: PF1.1 STM32F407V.98 | length 524.4
  Top Layer w10: v1(327.76,1530) 347.76,1530 607.76,1270 632.76,1270 680.91,1221.85 STM32F407V.98
PE2: PF2.1 STM32F407V.1 | length 481.7
  Top Layer w10: v1(227.76,1430) 257.76,1430 571.54,1116.22 STM32F407V.1
PE3: PF3.1 STM32F407V.2 | length 448.5
  Top Layer w10: v1(227.76,1330) 277.76,1330 511.23,1096.54 STM32F407V.2
PE4: PF4.1 STM32F407V.3 | length 556.6
  Top Layer w10: v1(127.76,1330) 177.76,1280 277.76,1280 480.91,1076.85 STM32F407V.3
PE5: PF5.1 STM32F407V.4 | length 423.4
  Top Layer w10: v1(227.76,1230) 277.76,1230 450.6,1057.17 STM32F407V.4
PE6: PF6.1 STM32F407V.5 | length 531.5
  Top Layer w10: v1(127.76,1230) 177.76,1180 277.76,1180 420.28,1037.48 STM32F407V.5
PE7: PF7.1 STM32F407V.38 | length 472.5
  Top Layer w10: STM32F407V.38 877.76,180 v1(927.76,130)
PE8: PF8.1 STM32F407V.39 | length 364.3
  Top Layer w10: STM32F407V.39 897.45,290.31 927.76,260 v1(927.76,230)
PE9: PF9.1 STM32F407V.40 | length 497.6
  Top Layer w10: STM32F407V.40 917.14,320.63 977.76,260 977.76,180 v1(1027.76,130)
PE10: PF10.1 STM32F407V.41 | length 389.4
  Top Layer w10: STM32F407V.41 936.82,350.94 1027.76,260 v1(1027.76,230)
PE11: PF11.1 STM32F407V.42 | length 522.7
  Top Layer w10: STM32F407V.42 956.51,381.26 1077.76,260 1077.76,180 v1(1127.76,130)
PE12: PF12.1 STM32F407V.43 | length 414.6
  Top Layer w10: STM32F407V.43 976.19,411.57 1127.76,260 v1(1127.76,230)
PE13: PF13.1 STM32F407V.44 | length 547.8
  Top Layer w10: STM32F407V.44 995.88,441.89 1177.76,260 1177.76,180 v1(1227.76,130)
PE14: PF14.1 STM32F407V.45 | length 439.7
  Top Layer w10: STM32F407V.45 1015.56,472.2 1227.76,260 v1(1227.76,230)
PE15: PF15.1 STM32F407V.46 | length 572.9
  Top Layer w10: STM32F407V.46 1035.25,502.52 1277.76,260 1277.76,180 v1(1327.76,130)
VBAT: STM32F407V.6 VBAT.1@227.76,1130 | length 398.2
  Top Layer w10: v1(227.76,1130) 277.76,1130 389.97,1017.8 STM32F407V.6
VCAP1: C3.1 STM32F407V.49 | length 155.6
  Top Layer w10: v2@1087.82,640.05 cw(c1072.16,624.39) 1094.3,624.39 ; STM32F407V.49 v2@1094.3,643.46 ; 1094.3,631.81 cw(c1105.96,631.81) v2@1097.71,640.05
  Bottom Layer w20: C3.1 v2(1092.76,645) C3.1
VCAP2: C4.1 STM32F407V.73 | length 126.4
  Top Layer w10: v2(1112.76,1070) 1119.62,1076.85 STM32F407V.73 ; v2@1117.71,1065.05 cw(c1146.2,1036.56) STM32F407V.73@1146.2,1076.85
  Bottom Layer w20: v2(1112.76,1070) C4.1@1141.43,1070
VDDA: C11.2 C12.2 L1.2 STM32F407V.21 STM32F407V.22 | length 353.7
  Top Layer w10: STM32F407V.22 635.6,702.83 v2(642.76,710) 630.25,722.52 STM32F407V.21 ; STM32F407V.22@608.57,702.83 ccw(c608.57,744.2) v2@637.82,714.95 ; 632.71,702.83 ccw(c632.71,720.06) v2@644.89,707.88 ; v2@635.76,710 ccw(c618.87,710) 630.82,721.95 ccw(c642.76,733.9) v2@642.76,717
  Bottom Layer w10: C12.2 608.28,705 C12.2@613.28,710
  Bottom Layer w20: L1.2 C11.2 C12.2@608.28,705 ; C12.2@613.28,710 v2(642.76,710)

## Polygon pours and split planes (outlines as drawn)
GND on Top Layer "Keep-Out Layer-No Net" (solid, remove dead copper, pour order 3): 627.76,1130 1127.76,1130 1127.76,630 627.76,630
GND on Top Layer "Keep-Out Layer-No Net" (solid, remove dead copper, pour order 8): 1677.76,1680 2.76,1680 2.76,1755 1752.76,1755 1752.76,5 2.76,5 2.76,1680 77.76,1680 77.76,80 1677.76,80 1677.76,1680
GND on Bottom Layer "Keep-Out Layer-No Net" (solid, remove dead copper, pour order 14): 2.76,980 2.76,680 287.76,680 290,682.24 295,687.24 295,982.24
GND on Bottom Layer "Keep-Out Layer-No Net" (solid, remove dead copper, pour order 12): 277.76,1480 1477.76,1480 1477.76,280 277.76,280 277.76,1480
GND on Bottom Layer "Keep-Out Layer-No Net" (solid, remove dead copper, pour order 15): 77.76,980 77.76,1680 1677.76,1680 1677.76,80 77.76,80 77.76,680 2.76,680 2.76,5 1752.76,5 1752.76,1755 2.76,1755 2.76,980 77.76,980

## Other copper
Top Layer:
  region net GND: 357.76,260 297.76,260 297.76,80 357.76,80
  rectangle net OSC1: 87.76,910 267.76,950
  rectangle net OSC2: 87.76,710 267.76,750
  rectangle net OSC2: 167.76,712.52 267.76,795
  rectangle net GND: 197.76,1600 257.76,1680
  rectangle net GND: 297.76,1600 357.76,1680
  region net GND: 157.76,1500 157.76,1560 77.76,1560 77.76,1500
  region net GND: 157.76,1400 157.76,1460 77.76,1460 77.76,1400
  region net GND: 157.76,200 157.76,260 77.76,260 77.76,200
  region net GND: 257.76,160 197.76,160 197.76,80 257.76,80
  region net GND: 1457.76,160 1397.76,160 1397.76,75 1457.76,75
  region net GND: 1557.76,160 1497.76,160 1497.76,75 1557.76,75
  region net GND: 1597.76,260 1597.76,200 1682.76,200 1682.76,260
  region net GND: 1597.76,1560 1597.76,1500 1677.76,1500 1677.76,1560
  region net GND: 1497.76,1460 1497.76,1400 1677.76,1400 1677.76,1460
  rectangle net GND: 1497.76,1600 1557.76,1680
  rectangle net OSC1: 167.76,865 267.76,950
  rectangle net GND: 72.76,770 147.76,890
Bottom Layer:
  rectangle net GND: 311.22,255 357.76,284.62
  rectangle net GND: 1473.15,1400 1522.76,1446.54
  rectangle net GND: 1497.76,1600 1557.76,1685
  region net GND: 1597.76,1560 1597.76,1500 1682.76,1500 1682.76,1560
  region net GND: 1497.76,1460 1497.76,1400 1685,1400 1685,1460
  region net GND: 1597.76,260 1597.76,200 1682.76,200 1682.76,260
  region net GND: 1557.76,160 1497.76,160 1497.76,75 1557.76,75
  region net GND: 1457.76,160 1397.76,160 1397.76,75 1457.76,75
  region net GND: 357.76,260 297.76,260 297.76,75 357.76,75
  region net GND: 257.76,160 197.76,160 197.76,75 257.76,75
  region net GND: 157.76,200 157.76,260 72.76,260 72.76,200
  region net GND: 157.76,1400 157.76,1460 72.76,1460 72.76,1400
  region net GND: 157.76,1500 157.76,1560 72.76,1560 72.76,1500
  rectangle net GND: 197.76,1600 257.76,1685
  rectangle net GND: 297.76,1600 357.76,1685

## Silkscreen, mask and mechanical layers (free items; w line width, h text height)
Drill Guide:
  text ".Legend" at 1355,-102.76 h60
Mechanical 1:
  lines w10: 0,0 0,1760 1742.24,1760 1757.76,1760 1757.76,1744.47 1757.76,0 22.24,0 0,0